# EAGLE board Taillight PCB (EAGLE 9.1.3)
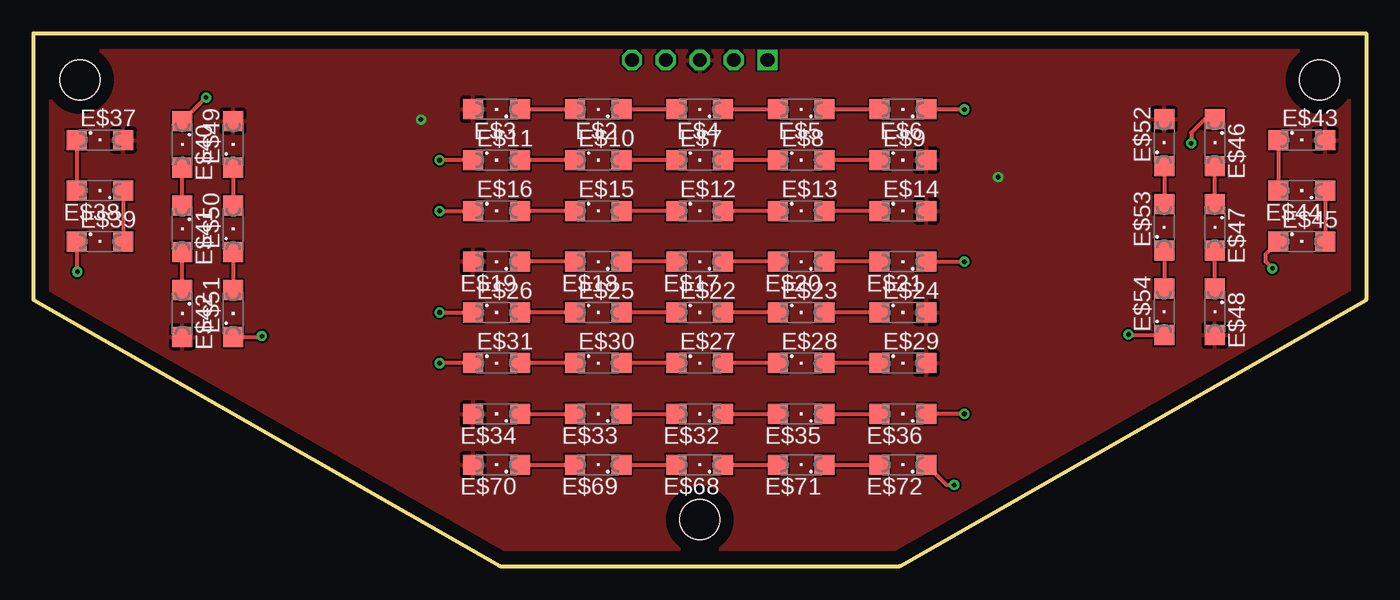
[diagram p0: board, top side]
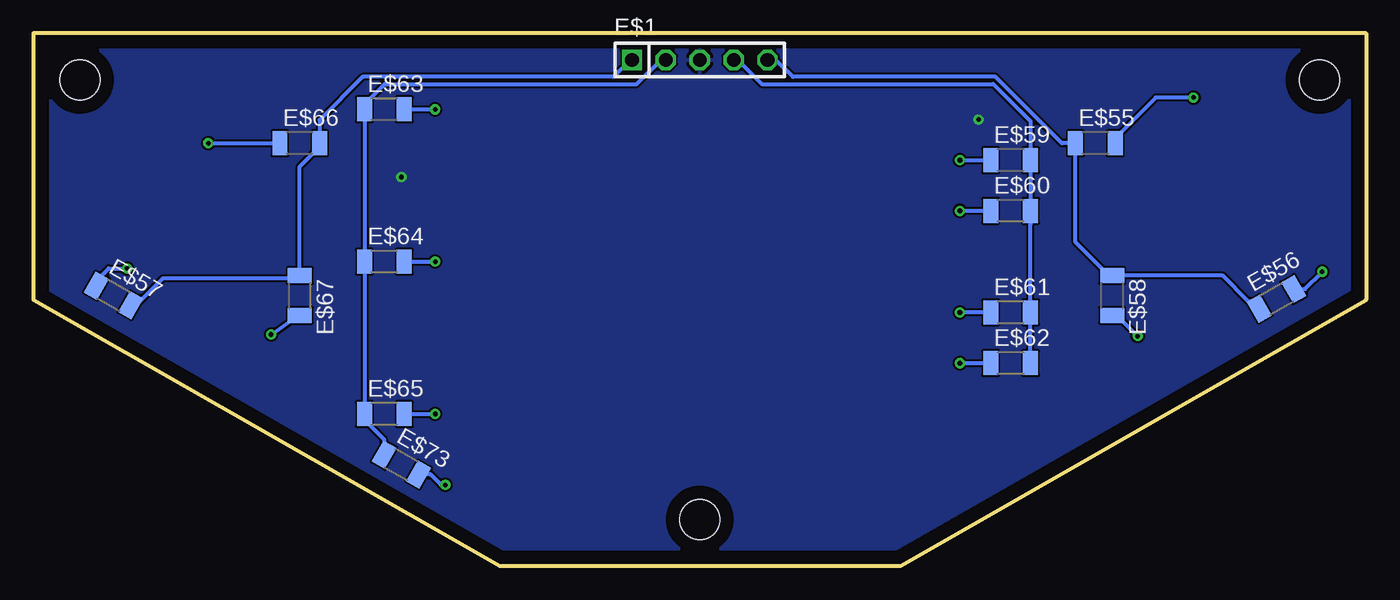
[diagram p1: board, bottom side, seen from below]

Size 100 x 40 mm. Coordinates in mm from the lower left corner, seen from the top.
Outline: 0,40 100,40 100,20 65,0 35,0 0,20 0,40
Copper layers (1*16): Top 0.035mm / dielectric 1.5mm / Bottom 0.035mm
Design rules "default": minimum track width 6mil, minimum drill 0.35mm, track to track 6mil, track to pad 6mil, pad to pad 6mil, via to via 6mil, smd to smd 6mil, copper to edge 40mil, drill to drill 6mil, minimum pad ring 10mil, minimum via ring 8mil, stop-mask expansion 4mil, vias tented up to drill 0mil, thermal gap 10mil
Holes 3 mm at 50,3.5 3.5,36.5 96.5,36.5

## Footprints (pad centres in the part's own frame; a part is rotated, then mirrored left to right if it is on the bottom)
1X05 = drill 1.016 square: 1 -5.08,0 | drill 1.016 octagon: 2 -2.54,0; 3 0,0; 4 2.54,0; 5 5.08,0
SML1206 = smd 1.5 x 1.5: A 1.75,0; C -1.75,0
R1206 = smd 1.12 x 1.8: 1 -1.49,0; 2 1.49,0

## Placement (x,y rotation side)
E$1  [1X05]  50,38 0 bottom
E$2  [SML1206]  42.38,34.29 180 top
E$3  [SML1206]  34.76,34.29 180 top
E$4  [SML1206]  50,34.29 180 top
E$5  [SML1206]  57.62,34.29 180 top
E$6  [SML1206]  65.24,34.29 180 top
E$7  [SML1206]  50,30.48 0 top
E$8  [SML1206]  57.62,30.48 0 top
E$9  [SML1206]  65.24,30.48 0 top
E$10  [SML1206]  42.38,30.48 0 top
E$11  [SML1206]  34.76,30.48 0 top
E$12  [SML1206]  50,26.67 0 top
E$13  [SML1206]  57.62,26.67 0 top
E$14  [SML1206]  65.24,26.67 0 top
E$15  [SML1206]  42.38,26.67 0 top
E$16  [SML1206]  34.76,26.67 0 top
E$17  [SML1206]  50,22.86 180 top
E$18  [SML1206]  42.38,22.86 180 top
E$19  [SML1206]  34.76,22.86 180 top
E$20  [SML1206]  57.62,22.86 180 top
E$21  [SML1206]  65.24,22.86 180 top
E$22  [SML1206]  50,19.05 0 top
E$23  [SML1206]  57.62,19.05 0 top
E$24  [SML1206]  65.24,19.05 0 top
E$25  [SML1206]  42.38,19.05 0 top
E$26  [SML1206]  34.76,19.05 0 top
E$27  [SML1206]  50,15.24 0 top
E$28  [SML1206]  57.62,15.24 0 top
E$29  [SML1206]  65.24,15.24 0 top
E$30  [SML1206]  42.38,15.24 0 top
E$31  [SML1206]  34.76,15.24 0 top
E$32  [SML1206]  50,11.43 180 top
E$33  [SML1206]  42.38,11.43 180 top
E$34  [SML1206]  34.76,11.43 180 top
E$35  [SML1206]  57.62,11.43 180 top
E$36  [SML1206]  65.24,11.43 180 top
E$37  [SML1206]  5,32 0 top
E$38  [SML1206]  5,28.19 180 top
E$39  [SML1206]  5,24.38 0 top
E$40  [SML1206]  11.18,31.67 270 top
E$41  [SML1206]  11.18,25.32 270 top
E$42  [SML1206]  11.18,18.97 270 top
E$43  [SML1206]  95.17,32 0 top
E$44  [SML1206]  95.17,28.19 180 top
E$45  [SML1206]  95.17,24.38 0 top
E$46  [SML1206]  88.65,31.8 270 top
E$47  [SML1206]  88.65,25.45 270 top
E$48  [SML1206]  88.65,19.1 270 top
E$49  [SML1206]  14.99,31.67 90 top
E$50  [SML1206]  14.99,25.32 90 top
E$51  [SML1206]  14.99,18.97 90 top
E$52  [SML1206]  84.84,31.8 90 top
E$53  [SML1206]  84.84,25.45 90 top
E$54  [SML1206]  84.84,19.1 90 top
E$55  [R1206]  20.32,31.75 0 bottom
E$56  [R1206]  6.73,20.07 29.7 bottom
E$57  [R1206]  93.98,20.32 330.3 bottom
E$58  [R1206]  19.05,20.32 270 bottom
E$59  [R1206]  26.67,30.48 0 bottom
E$60  [R1206]  26.67,26.67 0 bottom
E$61  [R1206]  26.67,19.05 0 bottom
E$62  [R1206]  26.67,15.24 0 bottom
E$63  [R1206]  73.66,34.29 0 bottom
E$64  [R1206]  73.66,22.86 0 bottom
E$65  [R1206]  73.66,11.43 0 bottom
E$66  [R1206]  80.01,31.75 0 bottom
E$67  [R1206]  80.01,20.32 270 bottom
E$68  [SML1206]  50,7.62 180 top
E$69  [SML1206]  42.38,7.62 180 top
E$70  [SML1206]  34.76,7.62 180 top
E$71  [SML1206]  57.62,7.62 180 top
E$72  [SML1206]  65.24,7.62 180 top
E$73  [R1206]  72.39,7.62 330.3 bottom

## Library data of the parts
E$1 = female headers
E$2-E$54 E$68-E$72 = led
E$55-E$67 E$73 = smd-ipc

## Nets
S$1: E$2.A E$3.C
S$2: E$2.C E$4.A
S$3: E$4.C E$5.A
S$4: E$5.C E$6.A
S$5: E$6.C E$63.2
S$6: E$20.C E$21.A
S$7: E$17.C E$20.A
S$8: E$17.A E$18.C
S$9: E$18.A E$19.C
S$10: E$33.A E$34.C
S$11: E$32.A E$33.C
S$12: E$32.C E$35.A
S$13: E$35.C E$36.A
S$14: E$36.C E$65.2
S$15: E$21.C E$64.2
S$16: E$1.2 E$63.1 E$64.1 E$65.1 E$73.1
S$17: E$52.C E$53.A
S$18: E$53.C E$54.A
S$19: E$54.C E$67.2
S$20: E$46.A E$47.C
S$21: E$47.A E$48.C
S$22: E$43.C E$44.A
S$23: E$44.C E$45.A
S$24: E$1.1 E$57.2 E$66.2 E$67.1
S$25: E$46.C E$66.1
S$26: E$45.C E$57.1
S$27: E$8.A E$9.C
S$28: E$7.A E$8.C
S$29: E$7.C E$10.A
S$30: E$10.C E$11.A
S$31: E$11.C E$59.1
S$32: E$69.A E$70.C
S$33: E$26.C E$61.1
S$34: E$25.C E$26.A
S$35: E$22.C E$25.A
S$36: E$22.A E$23.C
S$37: E$23.A E$24.C
S$38: E$28.A E$29.C
S$39: E$27.A E$28.C
S$40: E$27.C E$30.A
S$41: E$30.C E$31.A
S$42: E$31.C E$62.1
S$43: E$13.A E$14.C
S$44: E$12.A E$13.C
S$45: E$12.C E$15.A
S$46: E$15.C E$16.A
S$47: E$16.C E$60.1
S$49: E$37.C E$38.A
S$50: E$38.C E$39.A
S$51: E$39.C E$56.2
S$52: E$41.A E$42.C
S$53: E$40.A E$41.C
S$54: E$49.C E$50.A
S$55: E$50.C E$51.A
S$56: E$51.C E$58.2
S$57: E$40.C E$55.2
S$58: E$1.5 E$55.1 E$56.1 E$58.1
S$59: E$68.A E$69.C
S$60: E$68.C E$71.A
S$61: E$1.4 E$59.2 E$60.2 E$61.2 E$62.2
S$62: E$71.C E$72.A
S$63: E$72.C E$73.2
VCC: E$1.3 E$3.A E$9.A E$14.A E$19.A E$24.A E$29.A E$34.A E$37.A E$42.A E$43.A E$48.A E$49.A E$52.A E$70.A

## Tracks (layer width: path | path; a pad name or v marks a point on that pad's centre or on a via)
S$1
  Top 0.3: E$3.C E$2.A
S$2
  Top 0.3: E$2.C E$4.A
S$3
  Top 0.3: E$4.C E$5.A
S$4
  Top 0.3: E$5.C E$6.A
S$5  (via drill 0.35)
  Top 0.3: E$6.C v69.85,34.29
  Bottom 0.3: E$63.2 v69.85,34.29
S$6
  Top 0.3: E$21.A E$20.C
S$7
  Top 0.3: E$20.A E$17.C
S$8
  Top 0.3: E$17.A E$18.C
S$9
  Top 0.3: E$18.A E$19.C
S$10
  Top 0.3: E$34.C E$33.A
S$11
  Top 0.3: E$33.C E$32.A
S$12
  Top 0.3: E$32.C E$35.A
S$13
  Top 0.3: E$35.C E$36.A
S$14  (via drill 0.35)
  Top 0.3: v69.85,11.43 E$36.C
  Bottom 0.3: E$65.2 v69.85,11.43
S$15  (via drill 0.35)
  Top 0.3: E$21.C v69.85,22.86
  Bottom 0.3: E$64.2 v69.85,22.86
S$16
  Bottom 0.3: E$1.2 52.92,38 54.73,36.2 73.63,36.2 75.15,34.67 E$63.1 75.15,23.11 E$64.1 75.15,11.68 E$65.1 75.15,10.97 73.68,9.5 E$73.1
S$17
  Top 0.3: E$52.C E$53.A
S$18
  Top 0.3: E$53.C E$54.A
S$19  (via drill 0.35)
  Top 0.3: v82.17,17.4 82.17,17.35 E$54.C
  Bottom 0.3: v82.17,17.4 82.09,17.4 80.11,18.83 E$67.2
S$20
  Top 0.3: E$47.C E$46.A
S$21
  Top 0.3: E$48.C E$47.A
S$22
  Top 0.3: E$43.C E$44.A
S$23
  Top 0.3: E$44.C E$45.A
S$24
  Bottom 0.3: E$57.2 92.31,19.58 90.3,21.59 80.23,21.59 E$67.1 80.01,30.01 78.52,31.5 E$66.2 78.52,33.49 75.28,36.73 56.48,36.73 55.21,38 E$1.1
S$25  (via drill 0.35)
  Top 0.3: v86.87,31.75 86.87,32.53 87.89,33.55 E$46.C
  Bottom 0.3: E$66.1 81.63,31.88 81.75,31.75 v86.87,31.75
S$26  (via drill 0.35)
  Top 0.3: E$45.C 92.46,23.42 92.46,22.86 v92.96,22.35
  Bottom 0.3: v92.96,22.35 94.36,22.35 95.27,21.44 E$57.1
S$27
  Top 0.3: E$9.C E$8.A
S$28
  Top 0.3: E$8.C E$7.A
S$29
  Top 0.3: E$7.C E$10.A
S$30
  Top 0.3: E$10.C E$11.A
S$31  (via drill 0.35)
  Top 0.3: E$11.C v30.48,30.48
  Bottom 0.3: v30.48,30.48 E$59.1
S$32
  Top 0.3: E$70.C E$69.A
S$33  (via drill 0.35)
  Top 0.3: v30.48,19.05 E$26.C
  Bottom 0.3: E$61.1 v30.48,19.05
S$34
  Top 0.3: E$25.C E$26.A
S$35
  Top 0.3: E$22.C E$25.A
S$36
  Top 0.3: E$23.C E$22.A
S$37
  Top 0.3: E$24.C E$23.A
S$38
  Top 0.3: E$29.C E$28.A
S$39
  Top 0.3: E$28.C E$27.A
S$40
  Top 0.3: E$27.C E$30.A
S$41
  Top 0.3: E$30.C E$31.A
S$42  (via drill 0.35)
  Top 0.3: E$31.C v30.48,15.24
  Bottom 0.3: v30.48,15.24 E$62.1
S$43
  Top 0.3: E$14.C E$13.A
S$44
  Top 0.3: E$13.C E$12.A
S$45
  Top 0.3: E$12.C E$15.A
S$46
  Top 0.3: E$15.C E$16.A
S$47  (via drill 0.35)
  Top 0.3: v30.48,26.67 E$16.C
  Bottom 0.3: E$60.1 v30.48,26.67
S$49
  Top 0.3: E$37.C E$38.A
S$50
  Top 0.3: E$38.C E$39.A
S$51  (via drill 0.35)
  Top 0.3: E$39.C 3.25,22.28 v3.3,22.1
  Bottom 0.3: E$56.2 4.6,20.8 v3.3,22.1
S$52
  Top 0.3: E$42.C E$41.A
S$53
  Top 0.3: E$41.C E$40.A
S$54
  Top 0.3: E$49.C E$50.A
S$55
  Top 0.3: E$50.C E$51.A
S$56  (via drill 0.35)
  Top 0.3: E$51.C 17.2,17.22 v17.14,17.27
  Bottom 0.3: E$58.2 18.7,18.83 17.27,17.4 v17.14,17.27
S$57  (via drill 0.35)
  Top 0.3: v12.95,35.18 v12.94,35.18 E$40.C
  Bottom 0.3: v12.95,35.18 15.78,35.18 18.83,32.13 E$55.2
S$58
  Bottom 0.3: E$56.1 8.57,19.88 8.83,19.88 10.76,21.81 E$58.1 19.3,21.81 21.81,24.32 E$55.1 22.83,31.75 27.81,36.73 43.02,36.73 44.28,38 E$1.5
S$59
  Top 0.3: E$69.C E$68.A
S$60
  Top 0.3: E$68.C E$71.A
S$61
  Bottom 0.3: E$62.2 25.18,15.49 25.16,15.51 25.16,15.73 25.18,15.75 E$61.2 25.18,25.65 E$60.2 E$59.2 25.18,33.4 27.97,36.2 45.34,36.2 47.14,38 E$1.4
S$62
  Top 0.3: E$71.C E$72.A
S$63  (via drill 0.35)
  Top 0.3: E$72.C 68.51,6.1 v69.09,6.1
  Bottom 0.3: v69.09,6.1 69.42,6.1 70.21,6.88 E$73.2
VCC  (via drill 0.35)
  other vias: 29.08,33.53 72.39,29.21
  pour Bottom: -15.25,43.18 1.26,-3.81 80.01,-3.81 115.57,31.75 104.14,43.18
  pour Top: -7.62,46.99 -7.62,1.27 -5.08,-1.27 0,-6.35 90.17,-6.35 105.41,8.89 105.41,34.29 105.41,44.45 102.87,46.99

## Text on the board
tText: A | A | A | A | A | A | A | A | A | A | A | A | A | A | A | A | A | A | A | A | A | A | A | A | A | A | A | A | A | A | A | A | A | A | A | A | A | A | A | A | A | A | A | A | A | A | A | A | A | A | A | A | A | A | A | A | A | A
bText: 5 | 1 | 1: RTS / 2: TL / 3: 12V / 4: BR_LI / 5: LTS | 200 | 200 | 200 | 200 | LTS | RTS | 200 | TL & BR_LI | 200 | 200 | 200 | 200 | 200 | 200 | Onboard computer for bicycle / Taillight board / rev1 | 200 | 2x200 | 40x red LEDs / 18x orange LEDs / 14x 200 ohm / SMD 1206
200bmp: E:/Silvio/Youtube/Vizualni dio/Logotip/PCB dno logo.bmp